# Altium PCB LM-004-A.PcbDoc
Units mil, origin at the board's own origin, x right, y up, seen from the top; angles counter-clockwise.
Board outline 2155.25 x 3754 mil, 4 copper layers (Top Layer, Signal Layer 2, Signal Layer 1, Bottom Layer), stack 30.635 mil thick; 51 components, 69 nets, 287 pads, 42 vias.
Unrouted connection lines stored in the file: 5.
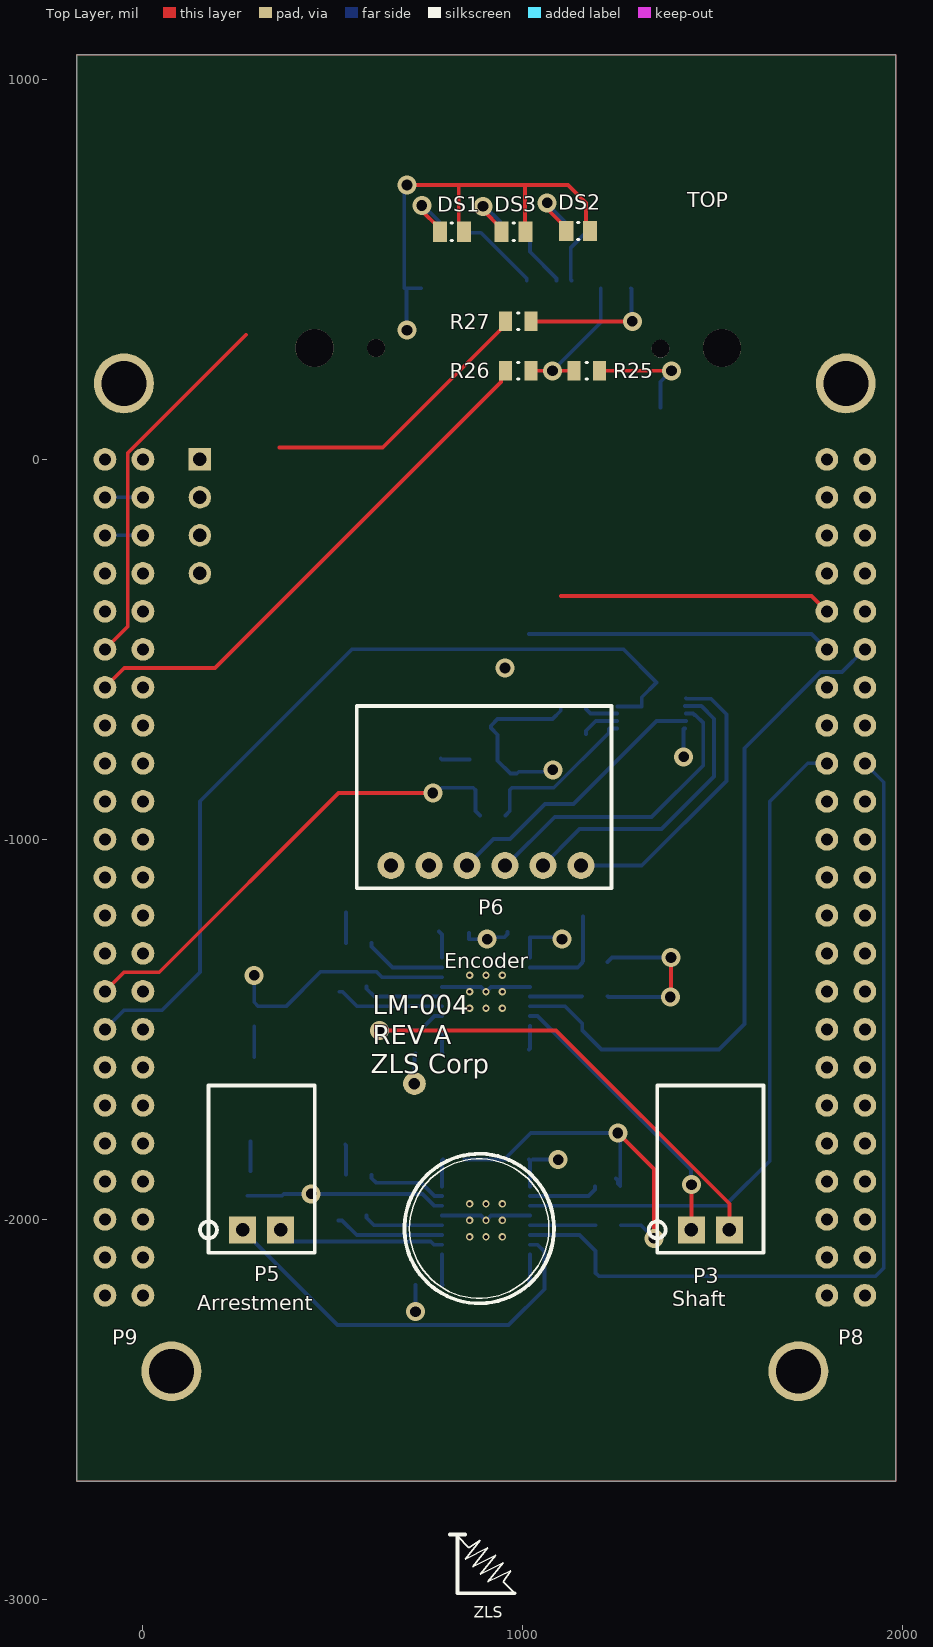
[diagram p0: Top Layer view]
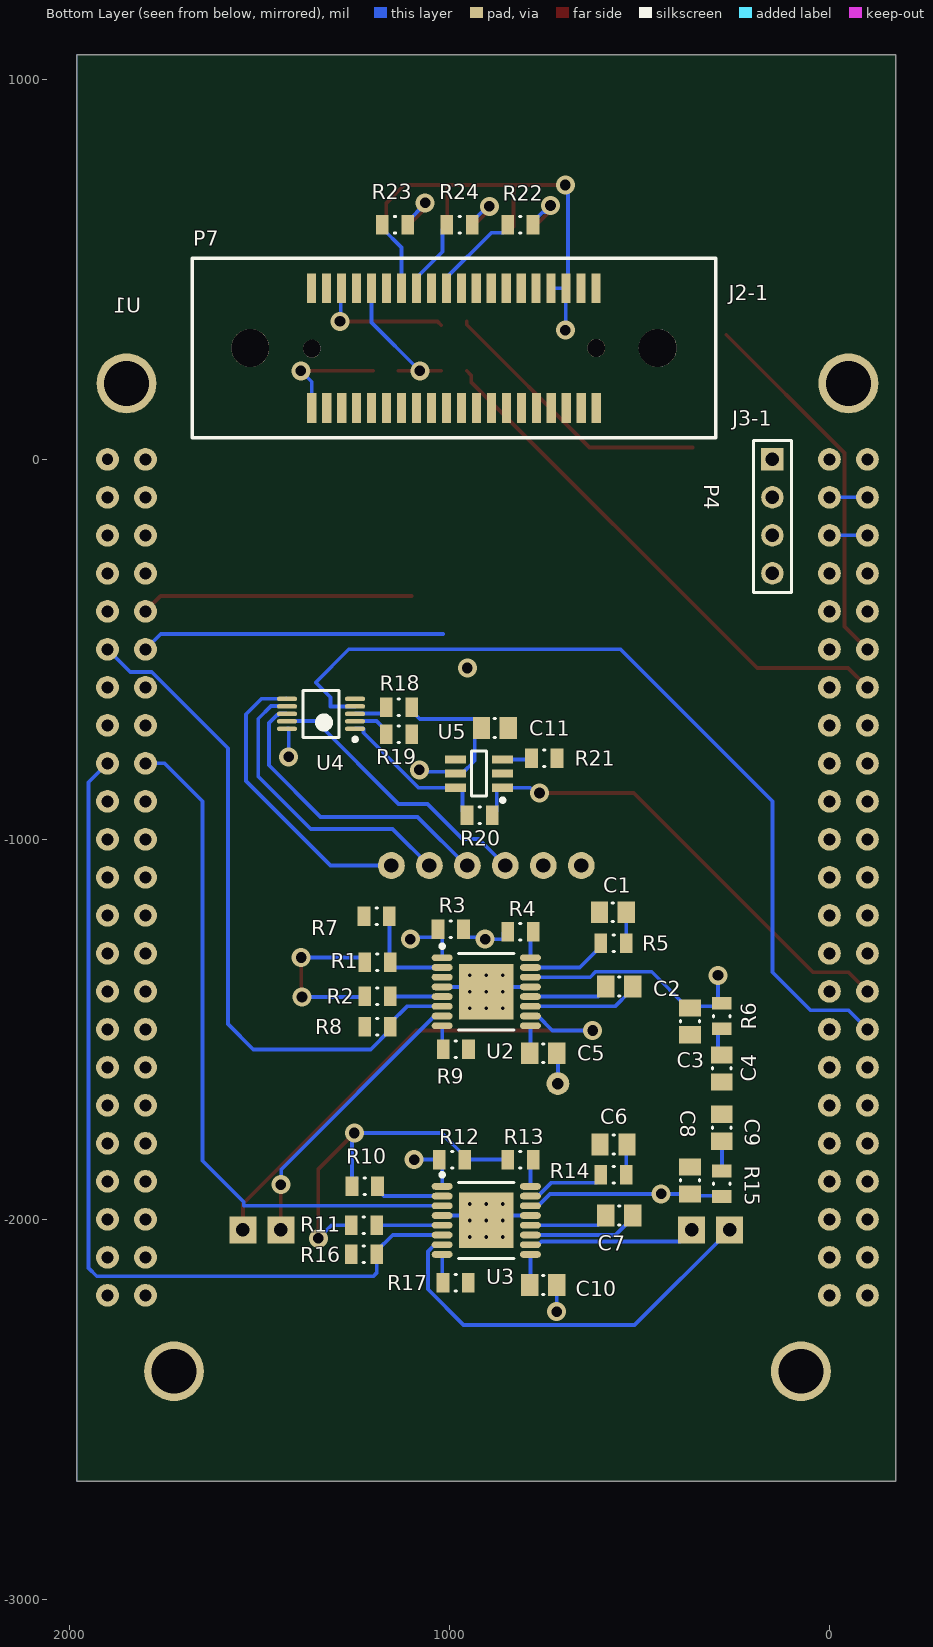
[diagram p1: Bottom Layer view, seen from below]
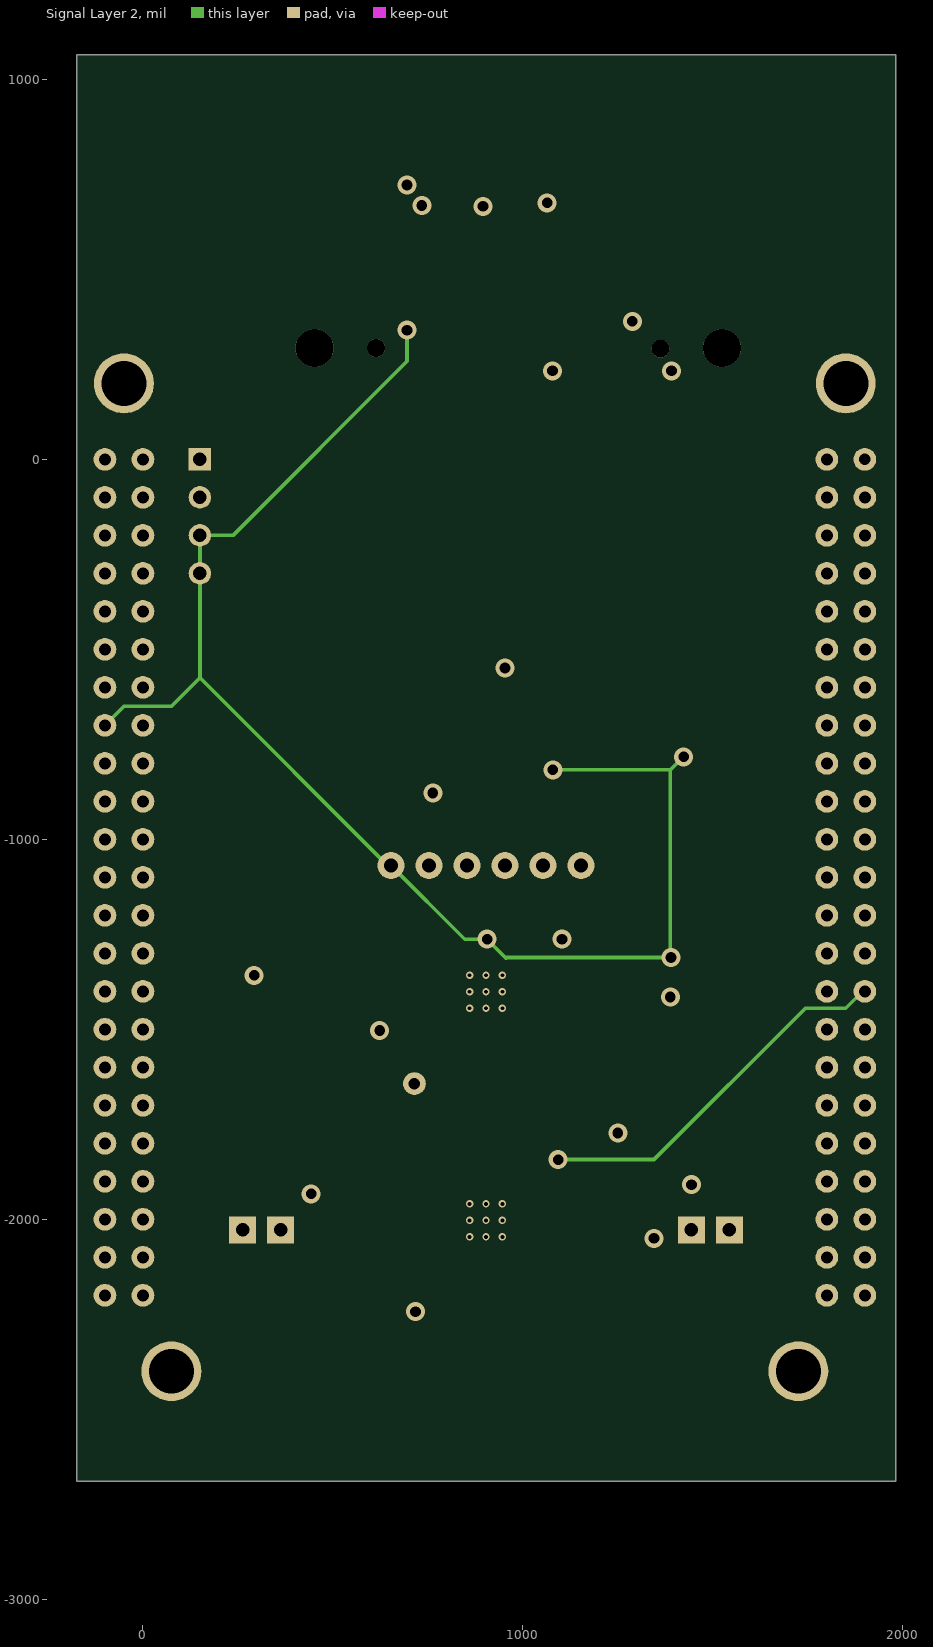
[diagram p2: Signal Layer 2]
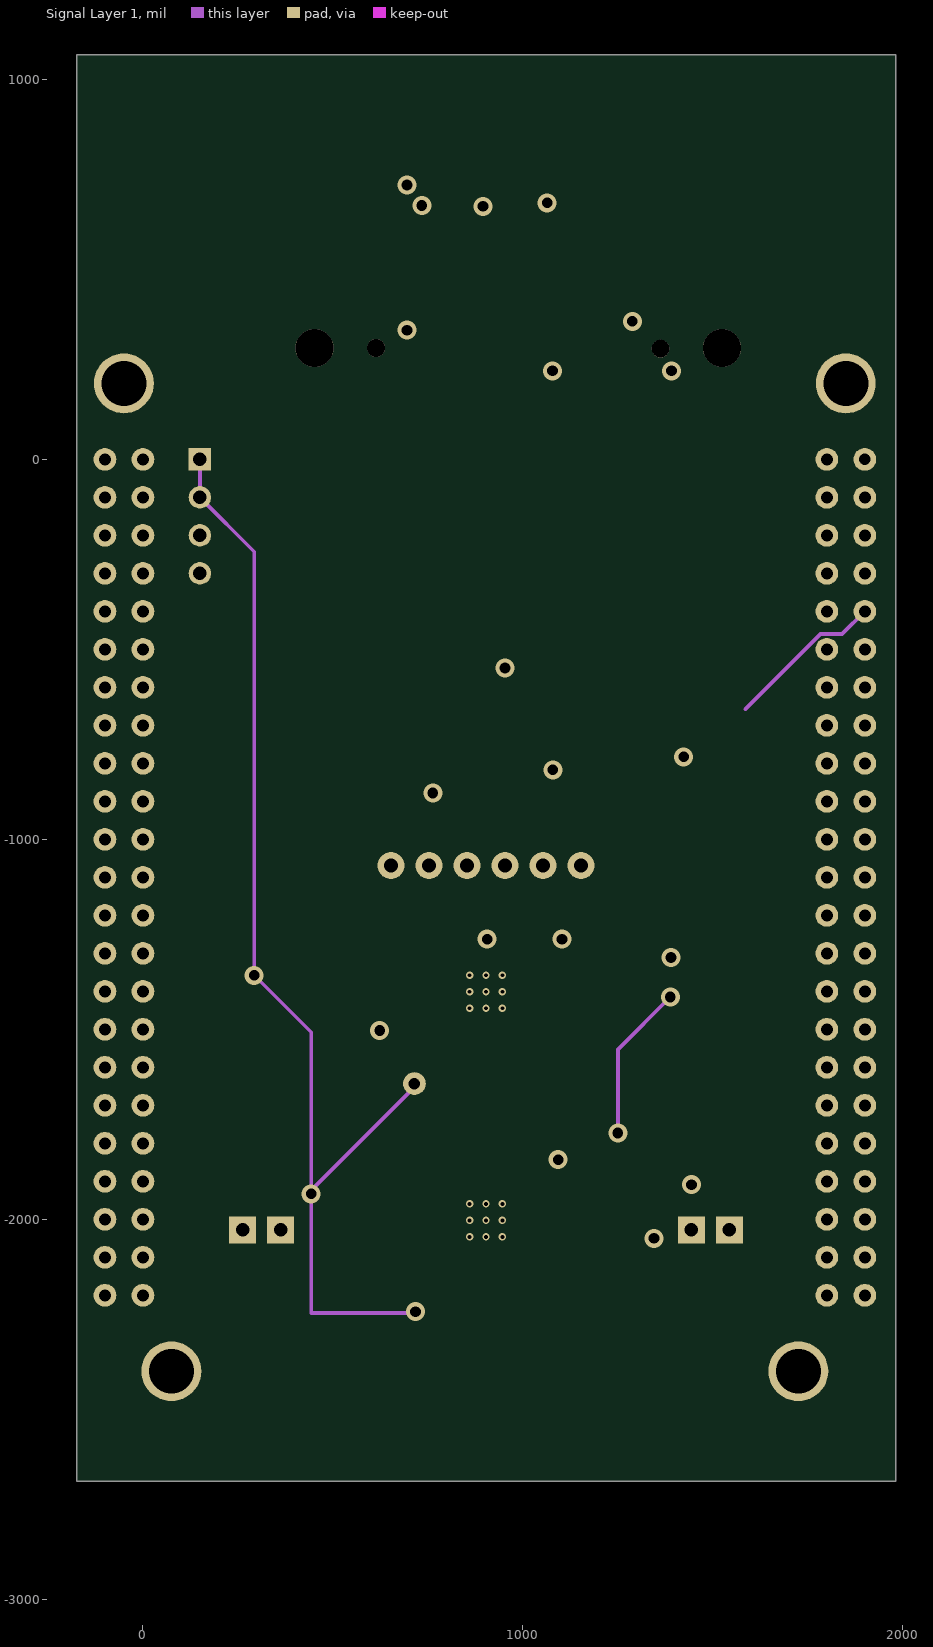
[diagram p3: Signal Layer 1]

## Layer stack, top to bottom
Top Solder: solder mask 0.4, Solder Resist, Dk 3.5
Top Layer: signal copper 1.4
Dielectric 1: core 10, FR-4, Dk 4.2
Signal Layer 2: signal copper 1.4173
Dielectric 4: prepreg 5, Dk 4.2
Signal Layer 1: signal copper 1.4173
Dielectric 3: core 10, Dk 4.2
Bottom Layer: signal copper 1.4
Bottom Solder: solder mask 0.4, Solder Resist, Dk 3.5

## Board outline
-174.24,-2689 1981,-2689 1981,1065 -174.24,1065

## Design rules (kind name [scope] priority, off if disabled: settings)
Clearance [All] p1: gap=5 ignorepadtopadclearanceinfootprint=FALSE
HoleSize [All] p1: absolutevalues=TRUE maxlimit=196.85 minlimit=1 maxpercent=80.000 minpercent=20.000
MinimumSolderMaskSliver [All] p1: minsoldermaskwidth=1.57
PolygonConnect [All] p1: connectstyle=Relief reliefconductorwidth=10 reliefentries=4 polygonreliefangle="90 Angle" airgapwidth=10
RoutingVias [All] p1: holewidth=28 width=50 viastyle="Through Hole" minholewidth=28 minwidth=50 maxholewidth=28 maxwidth=50
SilkToSolderMaskClearance [IsPad] p1: minsilkscreentomaskgap=3.94 clearancetoexposedcopper=TRUE
SolderMaskExpansion [All] p1: expansion=4
Width [All] p1: maxlimit=10 minlimit=10 preferedwidth=10
27 further rules are at their usual default settings.

## Classes and differential pairs
component class Bluetooth: DS1 DS2 DS3 P7 R4 R9 R15 R23 R24 R26
component class BBB_Connections: P2 P3 P4 P5 P6 U1
component class DC-Motor-DRV: C1 C2 C3 C4 C5 C6 C7 C9 C10 C11 R1 R2 R3 R4 R6 R7 R8 R9 R10 R11 R12 R13 R15 R16 R18 R19 R24 R26 U3
component class Encoder: C11 P6 R4 R15 R18 R19 R20 U4

## Components (designator, comment, footprint, x,y, rotation, side; value= is the part's Value field where it differs from the comment)
C1 ".33uF" CAPC0805(2012)145_N 570,-1192 r180 bottom
C2 "0.1uF" CAPC0805(2012)145_N 553,-1387.2 r180 bottom
C3 "0.1uF" CAPC0805(2012)145_N 366.8,-1479 r270 bottom
C4 "4.7uF" CAPC0805(2012)145_N 283,-1603 r270 bottom
C5 "0.1uF" CAPC0805(2012)145_N 753,-1563 r180 bottom
C6 ".33uF" CAPC0805(2012)145_N 568,-1803 r180 bottom
C7 "CAP CER 0.1UF 25V X7R 0805" CAPC0805(2012)145_N 553,-1990.2 r180 bottom
C8 "CAP CER 0.1UF 25V X7R 0805" CAPC0805(2012)145_N 366.8,-1897.76 r90 bottom
C9 "CAP CER 0.1UF 25V X7R 0805" CAPC0805(2012)145_N 283,-1759 r90 bottom
C10 "CAP CER 0.1UF 25V X7R 0805" CAPC0805(2012)145_N 753,-2173 r180 bottom
C11 "CAP CER 0.1UF 25V X7R 0805" CAPC0805(2012)145_N 880.48,-707.01 r180 bottom
DS1 "Lite-On LTST-S220KGKT Green LED, 571 nm 2012 (0805) Side View, Rectangle Lens SMD package" 0805C_L 813.24,598.99 r180 top
DS2 "Lite-On LTST-S220KGKT Green LED, 571 nm 2012 (0805) Side View, Rectangle Lens SMD package" 0805C_L 1145.48,601.23 r180 top
DS3 "Lite-On LTST-S220KGKT Green LED, 571 nm 2012 (0805) Side View, Rectangle Lens SMD package" 0805C_L 975.48,598.99 r180 top
P3 "IPL1-102-01-F-S-RA-K" IPL1-102-01-F-S-RA-K 1493.55,-2027.9 r0 top locked
P4 "SSW-104-01-G-S" HDR1X4 150,0 r270 bottom
P5 "IPL1-102-01-F-S-RA-K" IPL1-102-01-F-S-RA-K 312.45,-2027.9 r0 top locked
P6 "IPL1-106-01-L-S-RA-K" IPL1-106-01-L-S-RA-K 903,-1069 r0 top locked
P7 "FSI-120-03-G-D-E-AB" FSI-120-03-G-D-E-AB 988,293 r180 bottom
R1 "10K" RESC0805(2012)_L 1189.54,-1323 r180 bottom
R2 "10K" RESC0805(2012)_L 1189.54,-1412.8 r180 bottom
R3 "10K" RESC0805(2012)_L 996.65,-1237.01 r0 bottom
R4 "10K" RESC0805(2012)_L 813,-1243 r180 bottom
R5 "10K" RESC0805(2012)_L 568.1,-1273 r0 bottom
R6 "10K" RESC0805(2012)_L 283,-1465.16 r270 bottom
R7 "DNP" RESC0805(2012)_L 1191.54,-1203 r0 bottom
R8 "10K" RESC0805(2012)_L 1189.54,-1493 r0 bottom
R9 "10K" RESC0805(2012)_L 983,-1553 r180 bottom
R10 "10K" RESC0805(2012)_L 1223,-1913 r180 bottom
R11 "10K" RESC0805(2012)_L 1225,-2015.8 r180 bottom
R12 "10K" RESC0805(2012)_L 993,-1843 r0 bottom
R13 "10K" RESC0805(2012)_L 813,-1843 r180 bottom
R14 "10K" RESC0805(2012)_L 568.1,-1883 r0 bottom
R15 "10K" RESC0805(2012)_L 283,-1906.61 r90 bottom
R16 "10K" RESC0805(2012)_L 1225,-2092.57 r0 bottom
R17 "10K" RESC0805(2012)_L 983.69,-2167.01 r180 bottom
R18 "10K" RESC0805(2012)_L 1133,-653 r180 bottom
R19 "10K" RESC0805(2012)_L 1133,-723 r0 bottom
R20 "DNP" RESC0805(2012)_L 920.48,-937.01 r0 bottom
R21 "43.2K" RESC0805(2012)_L 750.48,-787.01 r180 bottom
R22 "3.9k" RESC0805(2012)_L 813.24,617 r180 bottom
R23 "3.9k" RESC0805(2012)_L 1143.24,617 r180 bottom
R24 "3.9k" RESC0805(2012)_L 973.24,617 r180 bottom
R25 "10K" RESC0805(2012)_L 1168,233 r180 top value=3.9k
R26 "100" RESC0805(2012)_L 988,233 r0 top value=3.9k
R27 "100" RESC0805(2012)_L 988,363 r0 top value=3.9k
U1 "BBB" "BEAGLEBONE BLACK MEZANINE" 900,-1100 r180 bottom locked
U2 "DRV8801PWPR" DRV8801PWPR 903,-1401.18 r180 bottom
U3 "DRV8801PWPR" DRV8801PWPR 903,-2003 r180 bottom locked
U4 "MAX1484EUB+" MAX1484EUB+ 1338,-670 r0 bottom
U5 "LTC6994MPS6-2#TRMPBF" LTC6994MPS6-2#TRMPBF 921.98,-827.01 r0 bottom

## Footprints (in the part's own frame and the unit in brackets; to place one, negate y for a bottom-side part, rotate by r counter-clockwise, add the part's x,y. Pads: shape width x height; smd on the part's side, far side on the other; paste and mask are expansions set on the pad)
0805C_L [mm]
  rect 0.95x1.35 smd: 1(-0.8,0) 2(0.8,0)
  silkscreen extent -0.05,-0.58 0.05,0.58, body extent -1.1,-0.72 1.1,0.72, height 0.75
"BEAGLEBONE BLACK MEZANINE" [mil]
  round 60 hole 31.5: 8-1(-900,1100) 8-3(-900,1000) 8-4(-1000,1000) 8-5(-900,900) 8-6(-1000,900) 8-7(-900,800) 8-8(-1000,800) 8-9(-900,700) 8-10(-1000,700) 8-11(-900,600) 8-12(-1000,600) 8-13(-900,500) 8-14(-1000,500) 8-15(-900,400) 8-16(-1000,400) 8-17(-900,300) 8-18(-1000,300) 8-19(-900,200) 8-20(-1000,200) 8-21(-900,100) 8-22(-1000,100) 8-23(-900,0) 8-24(-1000,0) 8-25(-900,-100) 8-26(-1000,-100) 8-27(-900,-200) 8-28(-1000,-200) 8-29(-900,-300) 8-30(-1000,-300) 8-31(-900,-400) 8-32(-1000,-400) 8-33(-900,-500) 8-34(-1000,-500) 8-35(-900,-600) 8-36(-1000,-600) 8-37(-900,-700) 8-38(-1000,-700) 8-39(-900,-800) 8-40(-1000,-800) 8-41(-900,-900) 8-42(-1000,-900) 8-43(-900,-1000) 8-44(-1000,-1000) 8-45(-900,-1100) 8-46(-1000,-1100) 9-1(1000,1100) 9-2(900,1100) 9-3(1000,1000) 9-4(900,1000) 9-5(1000,900) 9-6(900,900) 9-7(1000,800) 9-8(900,800) 9-9(1000,700) 9-10(900,700) 9-11(1000,600) 9-12(900,600) 9-13(1000,500) 9-14(900,500) 9-15(1000,400) 9-16(900,400) 9-17(1000,300) 9-18(900,300) 9-19(1000,200) 9-20(900,200) 9-21(1000,100) 9-22(900,100) 9-23(1000,0) 9-24(900,0) 9-25(1000,-100) 9-26(900,-100) 9-27(1000,-200) 9-28(900,-200) 9-29(1000,-300) 9-30(900,-300) 9-31(1000,-400) 9-32(900,-400) 9-33(1000,-500) 9-34(900,-500) 9-35(1000,-600) 9-36(900,-600) 9-37(1000,-700) 9-38(900,-700) 9-39(1000,-800) 9-40(900,-800) 9-41(1000,-900) 9-42(900,-900) 9-43(1000,-1000) 9-44(900,-1000) 9-45(1000,-1100) 9-46(900,-1100)
  round 60 hole 30 paste+0: 8-2(-1000,1100)
  round 157.48 hole 118.11 paste+0: ""(-950,1300)
  round 157.48 hole 118.11: ""(-825,-1300) ""(825,-1300) ""(950,1300)
  body extent -1047,-1163 1048,1157, height 335
CAPC0805(2012)145_N [mm] "Chip Capacitor, Body 2.0x1.2mm, Height 1.45mm, IPC Medium Density"
  rect 1.15x1.45 smd: 1(-0.9,0) 2(0.9,0)
  silkscreen extent -0.05,-0.62 0.05,0.63, body extent -1.1,-0.72 1.1,0.73, height 1.45
DRV8801PWPR [mm] "IC MOTOR DRIVER PAR 16HTSSOP"
  oval 1.4x0.45 smd: 1(-2.95,2.275) 2(-2.95,1.625) 3(-2.95,0.975) 4(-2.95,0.325) 5(-2.95,-0.325) 6(-2.95,-0.975) 7(-2.95,-1.625) 8(-2.95,-2.275) 9(2.95,-2.275) 10(2.95,-1.625) 11(2.95,-0.975) 12(2.95,-0.325) 13(2.95,0.325) 14(2.95,0.975) 15(2.95,1.625) 16(2.95,2.275)
  rect 3.65x3.7 smd: 17(0,0)
  silkscreen extent -3.08,-2.55 1.85,3.17, body extent -3.2,-2.55 3.2,2.55, height 1.2
FSI-120-03-G-D-E-AB [mil]
  round 100 hole 100: hole(-536.2,0) hole(536.2,0)
  round 47 hole 47: hole(-374.3,-1.6) hole(374.3,0)
  rect 24x78.74 smd: J2-1(373.91,157.36) J2-2(334.51,157.36) J2-3(295.11,157.36) J2-4(255.71,157.36) J2-5(216.31,157.36) J2-6(176.91,157.36) J2-7(137.51,157.36) J2-8(98.11,157.36) J2-9(58.71,157.36) J2-10(19.31,157.36) J2-11(-20.09,157.36) J2-12(-59.49,157.36) J2-13(-98.89,157.36) J2-14(-138.29,157.36) J2-15(-177.69,157.36) J2-16(-217.09,157.36) J2-17(-256.49,157.36) J2-18(-295.89,157.36) J2-19(-335.29,157.36) J2-20(-374.69,157.36) J3-1(374.3,-157.36) J3-2(334.9,-157.36) J3-3(295.5,-157.36) J3-4(256.1,-157.36) J3-5(216.7,-157.36) J3-6(177.3,-157.36) J3-7(137.9,-157.36) J3-8(98.5,-157.36) J3-9(59.1,-157.36) J3-10(19.7,-157.36) J3-11(-19.7,-157.36) J3-12(-59.1,-157.36) J3-13(-98.5,-157.36) J3-14(-137.9,-157.36) J3-15(-177.3,-157.36) J3-16(-216.7,-157.36) J3-17(-256.1,-157.36) J3-18(-295.5,-157.36) J3-19(-334.9,-157.36) J3-20(-374.3,-157.36)
  silkscreen extent -689,-236 689,236, body extent -633,-179 710,188, height 162
HDR1X4 [mm] "Connector; Header; 4 Position"
  rect 1.5x1.5 hole 0.9: 1(0,0)
  round 1.5 hole 0.9: 2(2.54,0) 3(5.08,0) 4(7.62,0)
  silkscreen extent -1.27,-1.27 8.89,1.27
IPL1-102-01-F-S-RA-K [mm] ".100 TERMINAL ASSEMBLY"
  rect 1.8x1.8 hole 0.91: 1(-1.27,0) 2(1.27,0)
  silkscreen extent -4.12,-1.52 3.56,9.65, body extent -3.3,-0.32 3.3,9.4, height 6.56
IPL1-106-01-L-S-RA-K [mm]
  round 1.8 hole 0.95: 1(-6.35,0) 2(-3.81,0) 3(-1.27,0) 4(1.27,0) 5(3.81,0) 6(6.35,0)
  silkscreen extent -8.64,-1.52 8.38,10.67, body extent -8.38,-0.25 8.38,10.41, height 6.56
LTC6994MPS6-2#TRMPBF [mm] "SOT23, 6-Leads, Body 2.90x3.23mm, Pitch 0.95mm, IPC Medium Density"
  rect 1.4x0.55 smd: 1(-1.575,0.95) 2(-1.575,0) 3(-1.575,-0.95) 4(1.575,-0.95) 5(1.575,0) 6(1.575,0.95)
  silkscreen extent -1.7,-1.5 0.5,1.9, body extent -1.93,-1.5 1.92,1.5, height 1
MAX1484EUB+ [mm]
  oval 1.35x0.3 smd: 1(-2.275,1) 2(-2.275,0.5) 3(-2.275,0) 4(-2.275,-0.5) 5(-2.275,-1) 6(2.275,-1) 7(2.275,-0.5) 8(2.275,0) 9(2.275,0.5) 10(2.275,1)
  silkscreen extent -2.4,-1.58 1.2,1.82, body extent -2.45,-1.6 2.45,1.6, height 1.09
RESC0805(2012)_L [mm] "Chip Resistor, Body 2.0x1.3mm, IPC High Density"
  rect 0.85x1.3 smd: 1(-0.85,0) 2(0.85,0)
  silkscreen extent -0.05,-0.55 0.05,0.55, body extent -1.1,-0.67 1.1,0.68, height 0.7

## Part data
C1 C6: library part CMP-1036-04795-1, "CAP CER 0.1UF 25V X7R 0805", Manufacturer="Wurth Electronics Inc.", Manufacturer Part Number=885012207069, Operating Temperature="-55°C ~ 125°C", Package / Case="0805 (2012 Metric)", Ratings=-, Supplier Part Number 1=732-8058-6-ND, Temperature Coefficient=X7R, Tolerance=±10%, Voltage - Rated=25V, Applications="General Purpose", Category=Capacitors, ComponentLink1Description=https://katalog.we-online.de/pbs/datasheet/885012207069.pdf, ComponentLink1URL=https://katalog.we-online.de/pbs/datasheet/885012207069.pdf, Features=-, Height - Seated (Max)=-, Lead Spacing=-, Lead Style=-, Mounting Type="Surface Mount, MLCC", Notification="Current market demand for these product types have resulted in fluctuating and extending lead times. Lead times may differ.", Packaging=Digi-Reel®, Part Status=Active, Pricing 1="1=0.1, 10=0.04, 100=0.0359, 500=0.0318 (USD)", RoHS="RoHS Compliant", Size / Dimension="0.079\" L x 0.049\" W (2.00mm x 1.25mm)", Stock 1=1331, Supplier 1=Digi-Key, Thickness (Max)="0.035\" (0.90mm)"
C2 C3 C5: library part CMP-1036-04795-1, "CAP CER 0.1UF 25V X7R 0805", Capacitance=0.1µF, Manufacturer="Murata Electronics North America", Manufacturer Part Number=GRM21BR71E104KA01L, Operating Temperature="-55°C ~ 125°C", Package / Case="0805 (2012 Metric)", Ratings=-, Supplier Part Number 1=490-1673-6-ND, Temperature Coefficient=X7R, Tolerance=±10%, Voltage - Rated=25V, Applications="General Purpose", Category=Capacitors, ComponentLink1Description=http://www.murata.com/~/media/webrenewal/support/library/catalog/products/capacitor/mlcc/c02e.ashx, ComponentLink1URL=http://www.murata.com/~/media/webrenewal/support/library/catalog/products/capacitor/mlcc/c02e.ashx, Features=-, Height - Seated (Max)=-, Lead Spacing=-, Lead Style=-, Mounting Type="Surface Mount, MLCC", Packaging=Digi-Reel®, Part Status=Active, Pricing 1="1=0.2, 10=0.145, 100=0.0683, 500=0.04788, 1000=0.03964 (USD)", RoHS="RoHS Compliant", Size / Dimension="0.079\" L x 0.049\" W (2.00mm x 1.25mm)", Stock 1=891652, Supplier 1=Digi-Key, Thickness (Max)="0.053\" (1.35mm)"
C4: library part CMP-1036-04795-1, "CAP CER 4.7UF 25V 10% X7R 0805", Capacitance=4.7µF, Manufacturer="Murata Electronics North America", Manufacturer Part Number=GRM21BR71E104KA01L, Operating Temperature="-55°C ~ 125°C", Package / Case="0805 (2012 Metric)", Ratings=-, Supplier Part Number 1=490-1673-6-ND, Temperature Coefficient=X7R, Tolerance=±10%, Voltage - Rated=25V, Applications="General Purpose", Category=Capacitors, ComponentLink1Description=http://www.murata.com/~/media/webrenewal/support/library/catalog/products/capacitor/mlcc/c02e.ashx, ComponentLink1URL=http://www.murata.com/~/media/webrenewal/support/library/catalog/products/capacitor/mlcc/c02e.ashx, Features=-, Height - Seated (Max)=-, Lead Spacing=-, Lead Style=-, Mounting Type="Surface Mount, MLCC", Packaging=Digi-Reel®, Part Status=Active, Pricing 1="1=0.2, 10=0.145, 100=0.0683, 500=0.04788, 1000=0.03964 (USD)", RoHS="RoHS Compliant", Size / Dimension="0.079\" L x 0.049\" W (2.00mm x 1.25mm)", Stock 1=891652, Supplier 1=Digi-Key, Thickness (Max)="0.053\" (1.35mm)"
C7 C8 C10 C11: library part CMP-1036-04795-1, Capacitance=0.1µF, Manufacturer="Murata Electronics North America", Manufacturer Part Number=GRM21BR71E104KA01L, Operating Temperature="-55°C ~ 125°C", Package / Case="0805 (2012 Metric)", Ratings=-, Supplier Part Number 1=490-1673-6-ND, Temperature Coefficient=X7R, Tolerance=±10%, Voltage - Rated=25V, Applications="General Purpose", Category=Capacitors, ComponentLink1Description=http://www.murata.com/~/media/webrenewal/support/library/catalog/products/capacitor/mlcc/c02e.ashx, ComponentLink1URL=http://www.murata.com/~/media/webrenewal/support/library/catalog/products/capacitor/mlcc/c02e.ashx, Features=-, Height - Seated (Max)=-, Lead Spacing=-, Lead Style=-, Mounting Type="Surface Mount, MLCC", Packaging=Digi-Reel®, Part Status=Active, Pricing 1="1=0.2, 10=0.145, 100=0.0683, 500=0.04788, 1000=0.03964 (USD)", RoHS="RoHS Compliant", Size / Dimension="0.079\" L x 0.049\" W (2.00mm x 1.25mm)", Stock 1=891652, Supplier 1=Digi-Key, Thickness (Max)="0.053\" (1.35mm)"
C9: library part CMP-1036-04795-1, "CAP CER 0.47UF 25V X7R 0805", Capacitance=4.7µF, Manufacturer="Murata Electronics North America", Manufacturer Part Number=GRM21BR71E104KA01L, Operating Temperature="-55°C ~ 125°C", Package / Case="0805 (2012 Metric)", Ratings=-, Supplier Part Number 1=490-1673-6-ND, Temperature Coefficient=X7R, Tolerance=±10%, Voltage - Rated=25V, Applications="General Purpose", Category=Capacitors, ComponentLink1Description=http://www.murata.com/~/media/webrenewal/support/library/catalog/products/capacitor/mlcc/c02e.ashx, ComponentLink1URL=http://www.murata.com/~/media/webrenewal/support/library/catalog/products/capacitor/mlcc/c02e.ashx, Features=-, Height - Seated (Max)=-, Lead Spacing=-, Lead Style=-, Mounting Type="Surface Mount, MLCC", Packaging=Digi-Reel®, Part Status=Active, Pricing 1="1=0.2, 10=0.145, 100=0.0683, 500=0.04788, 1000=0.03964 (USD)", RoHS="RoHS Compliant", Size / Dimension="0.079\" L x 0.049\" W (2.00mm x 1.25mm)", Stock 1=891652, Supplier 1=Digi-Key, Thickness (Max)="0.053\" (1.35mm)"
DS1 DS2 DS3: library part "LED A/K", Case/Package=0805, Case Code (Metric)=2012, Colour=Green, Forward Current=20mA, Forward Voltage=2V, Lens Colour=Colorless, Manufacturer="Vishay / Lite-On", Manufacturer Part Number=LTST-S220KGKT, Max Operating Temperature=85°C, Min Operating Temperature=-55°C, Package Quantity=4000, Power Dissipation=75W, Power Rating=75mW, Supplier Part Number 1=160-1468-1-ND, Case Code (Imperial)=0805, ComponentLink1Description=https://datasheet.ciiva.com/11775/0900766b80dc0b70-11775441.pdf, ComponentLink1URL=https://datasheet.ciiva.com/11775/0900766b80dc0b70-11775441.pdf, ComponentLink2Description=https://datasheet.ciiva.com/2110/s-110-ltst-s220kgkt-2110069.pdf, ComponentLink2URL=https://datasheet.ciiva.com/2110/s-110-ltst-s220kgkt-2110069.pdf, ComponentLink3Description=https://datasheet.ciiva.com/2110/s-110-ltst-s220kgkt-2110070.pdf, ComponentLink3URL=https://datasheet.ciiva.com/2110/s-110-ltst-s220kgkt-2110070.pdf, ComponentLink4Description=https://datasheet.ciiva.com/12400/100-ltst-s220kgkt-59602-12400886.pdf, ComponentLink4URL=https://datasheet.ciiva.com/12400/100-ltst-s220kgkt-59602-12400886.pdf, ComponentLink5Description=https://datasheet.ciiva.com/2110/s-110-ltst-s220kgkt-2110071.pdf, ComponentLink5URL=https://datasheet.ciiva.com/2110/s-110-ltst-s220kgkt-2110071.pdf, ComponentLink6Description=https://datasheet.ciiva.com/16379/ltst-s220kgkt-16379082.pdf, ComponentLink6URL=https://datasheet.ciiva.com/16379/ltst-s220kgkt-16379082.pdf, ComponentLink7Description=http://www.farnell.com/cad/2124774.pdf, ComponentLink7URL=http://www.farnell.com/cad/2124774.pdf, ComponentLink8Description=http://www.farnell.com/datasheets/693084.pdf, ComponentLink8URL=http://www.farnell.com/datasheets/693084.pdf, Depth=0.6mm, Dominant Wavelength=568nm, Height=0.6mm, Illumination Colour=Green, Lead Free="Lead Free", Length=2.1mm, Lens Style=Diffused,Colorless, Lens Transparency=Clear, Luminous Intensity=35mcd, Mount="Surface Mount", Number of Elements=1, Number of LEDs=1, Number of Pins=2, Packaging="Tape and Reel", Pricing 1="1=0.29, 10=0.212, 25=0.1564, 100=0.1117, 250=0.0759, 500=0.067, 1000=0.0525 (USD)", Pricing 2="1=0.325, 10=0.317, 100=0.23, 200=0.228, 400=0.182, 900=0.147, 3000=0.114, 9000=0.107 (GBP)", Radiation Hardening=No, RoHS=YES, Stock 1=74800, Stock 2=2271, Supplier 1=Digi-Key, Supplier 2=Farnell, Supplier Part Number 2=2062310, Test Current=20mA, Viewing Angle=130°, Wavelength=574nm, Width=1mm
P3 P5: Current Rating=-, Insulation Color=Natural, Manufacturer="Samtec Inc.", Material Flammability Rating="UL94 V-0", Operating Temperature="-55°C ~ 125°C", Supplier Part Number 1=IPL1-102-01-F-S-RA-K-ND, Voltage Rating="675VAC, 954VDC", Applications=-, Category="Connectors, Interconnects", ComponentLink1Description=http://suddendocs.samtec.com/prints/ipl1-1xx-xx-xxx-s-xx-x-xx-mkt.pdf, ComponentLink1URL=http://suddendocs.samtec.com/prints/ipl1-1xx-xx-xxx-s-xx-x-xx-mkt.pdf, Connector Type=Header, Contact Finish - Mating=Gold, Contact Finish - Post=Tin, Contact Finish Thickness - Mating="3.00µin (0.076µm)", Contact Finish Thickness - Post=-, Contact Length - Mating="0.215\" (5.46mm)", Contact Length - Post="0.085\" (2.16mm)", Contact Material="Phosphor Bronze", Contact Shape=Square, Contact Type="Male Pin", Fastening Type="Locking Ramp", Features=-, Ingress Protection=-, Insulation Height="0.240\" (6.10mm)", Insulation Material="Liquid Crystal Polymer (LCP)", Manufacturer Part Number=IPL1-102-01-F-S-RA-K, Mated Stacking Heights=-, Mounting Type="Through Hole, Right Angle", Number of Positions=2, Number of Positions Loaded=All, Number of Rows=1, Overall Contact Length=-, Packaging=Tube, Part Status=Active, Pitch - Mating="0.100\" (2.54mm)", Pricing 1="1=2.09 (USD)", RoHS="RoHS Compliant", Row Spacing - Mating=-, Shrouding="Shrouded - 4 Wall", Stock 1=0, Style="Board to Cable/Wire", Supplier 1=Digi-Key, Termination=Solder
P4: library part "Header 4", "Header, 4-Pin", Current Rating="5.7A per Contact", Insulation Color=Black, Manufacturer="Samtec Inc.", Material Flammability Rating="UL94 V-0", Operating Temperature="-55°C ~ 125°C", Supplier Part Number 1=SAM1209-04-ND, Voltage Rating=-, Applications=-, Category="Connectors, Interconnects", ComponentLink1Description=http://suddendocs.samtec.com/prints/ssw-1xx-xx-xxx-x-xx-xxx-xx-mkt.pdf, ComponentLink1URL=http://suddendocs.samtec.com/prints/ssw-1xx-xx-xxx-x-xx-xxx-xx-mkt.pdf, Connector Type=Receptacle, Contact Finish - Mating=Gold, Contact Finish - Post=Gold, Contact Finish Thickness - Mating="20.0µin (0.51µm)", Contact Finish Thickness - Post="3.00µin (0.076µm)", Contact Length - Post="0.104\" (2.64mm)", Contact Material="Phosphor Bronze", Contact Shape=Square, Contact Type=Forked, Fastening Type=Push-Pull, Features=-, Ingress Protection=-, Insulation Height="0.335\" (8.51mm)", Insulation Material="Liquid Crystal Polymer (LCP)", Manufacturer Part Number=SSW-104-01-G-S, Mated Stacking Heights=-, Mounting Type="Through Hole", Number of Positions=4, Number of Positions Loaded=All, Packaging=Bulk, Part Status=Active, Pitch - Mating="0.100\" (2.54mm)", Pricing 1="1=1.85, 10=1.654, 100=1.3623, 500=1.07684, 1000=0.9244, 5000=0.84331, 10000=0.81088 (USD)", RoHS="RoHS Compliant", Row Spacing - Mating=-, Stock 1=360, Style="Board to Board or Cable", Supplier 1=Digi-Key, Termination=Solder
P6: library part "Header 6", "Header, 6-Pin", Current Rating=-, Insulation Color=Natural, Manufacturer="Samtec Inc.", Material Flammability Rating="UL94 V-0", Operating Temperature="-55°C ~ 125°C", Supplier Part Number 1=SAM9602-ND, Voltage Rating="675VAC, 954VDC", Applications=-, Category="Connectors, Interconnects", ComponentLink1Description=http://suddendocs.samtec.com/prints/ipl1-1xx-xx-xxx-s-xx-x-xx-mkt.pdf, ComponentLink1URL=http://suddendocs.samtec.com/prints/ipl1-1xx-xx-xxx-s-xx-x-xx-mkt.pdf, Connector Type=Header, Contact Finish - Mating=Gold, Contact Finish - Post=Tin, Contact Finish Thickness - Mating="10.0µin (0.25µm)", Contact Finish Thickness - Post=-, Contact Length - Mating="0.215\" (5.46mm)", Contact Length - Post="0.085\" (2.16mm)", Contact Material="Phosphor Bronze", Contact Shape=Square, Contact Type="Male Pin", Fastening Type="Locking Ramp", Features=-, Ingress Protection=-, Insulation Height="0.240\" (6.10mm)", Insulation Material="Liquid Crystal Polymer (LCP)", Manufacturer Part Number=IPL1-106-01-L-S-RA-K, Mated Stacking Heights=-, Mounting Type="Through Hole, Right Angle", Number of Positions=6, Number of Positions Loaded=All, Number of Rows=1, Overall Contact Length=-, Packaging=Tube, Part Status=Active, Pitch - Mating="0.100\" (2.54mm)", Pricing 1="1=2.73, 34=2.39794, 102=2.18, 510=1.853, 1020=1.5805, 5032=1.417 (USD)", RoHS="RoHS Compliant", Row Spacing - Mating=-, Shrouding="Shrouded - 4 Wall", Stock 1=6, Style="Board to Cable/Wire", Supplier 1=Digi-Key, Termination=Solder
R1 R2 R3 R4 R5 R7 R8 R9 R10 R11 R12 R13 R14 R16 R17 R18 R19: library part CMP-1013-00215-1, "RES SMD 10K OHM 1% 1/8W 0805", Manufacturer="Vishay Dale", Manufacturer Part Number=CRCW080510K0FKEA, Operating Temperature="-55°C ~ 155°C", Package / Case="0805 (2012 Metric)", Power (Watts)="0.125W, 1/8W", Supplier Device Package=0805, Supplier Part Number 1=541-10.0KCCT-ND, Temperature Coefficient=±100ppm/°C, Tolerance=±1%, Category=Resistors, ComponentLink1Description=http://www.vishay.com/docs/20035/dcrcwe3.pdf, ComponentLink1URL=http://www.vishay.com/docs/20035/dcrcwe3.pdf, Composition="Thick Film", Failure Rate=-, Features="Automotive AEC-Q200", Height - Seated (Max)="0.020\" (0.50mm)", Packaging="Cut Tape (CT)", Part Status=Active, Pricing 1="1=0.1, 10=0.055, 100=0.0223, 1000=0.01003, 2500=0.0087 (USD)", RoHS="RoHS Compliant", Size / Dimension="0.079\" L x 0.049\" W (2.00mm x 1.25mm)", Stock 1=1104982, Supplier 1=Digi-Key
R6 R15: library part CMP-1013-00215-1, "RES SMD 1R OHM 1% 1/8W 0805", Manufacturer="Vishay Dale", Manufacturer Part Number=CRCW080510K0FKEA, Operating Temperature="-55°C ~ 155°C", Package / Case="0805 (2012 Metric)", Power (Watts)="0.125W, 1/8W", Supplier Device Package=0805, Supplier Part Number 1=541-10.0KCCT-ND, Temperature Coefficient=±100ppm/°C, Tolerance=±1%, Category=Resistors, ComponentLink1Description=http://www.vishay.com/docs/20035/dcrcwe3.pdf, ComponentLink1URL=http://www.vishay.com/docs/20035/dcrcwe3.pdf, Composition="Thick Film", Failure Rate=-, Features="Automotive AEC-Q200", Height - Seated (Max)="0.020\" (0.50mm)", Packaging="Cut Tape (CT)", Part Status=Active, Pricing 1="1=0.1, 10=0.055, 100=0.0223, 1000=0.01003, 2500=0.0087 (USD)", RoHS="RoHS Compliant", Size / Dimension="0.079\" L x 0.049\" W (2.00mm x 1.25mm)", Stock 1=1104982, Supplier 1=Digi-Key
R20: library part CMP-1013-00215-1, "RES SMD 0 OHM 5% 1/8W 0805"
R21: library part CMP-1013-00215-1, "RES SMD 43.2K OHM 1% 1/8W 0805", Manufacturer="Vishay Dale", Manufacturer Part Number=CRCW080543K2FKEA, Operating Temperature="-55°C ~ 155°C", Package / Case="0805 (2012 Metric)", Power (Watts)="0.125W, 1/8W", Supplier Device Package=0805, Supplier Part Number 1=541-43.2KCCT-ND, Temperature Coefficient=±100ppm/°C, Tolerance=±1%, Category=Resistors, ComponentLink1Description=http://www.vishay.com/docs/20035/dcrcwe3.pdf, ComponentLink1URL=http://www.vishay.com/docs/20035/dcrcwe3.pdf, Composition="Thick Film", Failure Rate=-, Features="Automotive AEC-Q200", Height - Seated (Max)="0.020\" (0.50mm)", Packaging="Cut Tape (CT)", Part Status=Active, Pricing 1="1=0.1, 10=0.055, 100=0.0223, 1000=0.01003, 2500=0.0087 (USD)", RoHS="RoHS Compliant", Size / Dimension="0.079\" L x 0.049\" W (2.00mm x 1.25mm)", Stock 1=68577, Supplier 1=Digi-Key
R22 R23 R24 R25 R26 R27: library part CMP-1013-00215-1, "2R55 0.125W 1% 0805 (2012 Metric)  SMD", Case-EIA=0805, Case-Metric=2012, Power="0.125 W", Tolerance="1 %", Technology=SMT
U1: library part Beaglebone_Black_Mezanine, "Beaglebone Black", Current Rating="5.7A per Contact", Insulation Color=Black, Manufacturer="Samtec Inc.", Manufacturer Part Number=SSW-123-01-G-D-LL, Material Flammability Rating="UL94 V-0", Operating Temperature="-55°C ~ 125°C", Supplier Part Number 1=SSW-123-01-G-D-LL-ND, Voltage Rating=-, Applications=-, Category="Connectors, Interconnects", Connector Type=Receptacle, Contact Finish - Mating=Gold, Contact Finish - Post=Gold, Contact Finish Thickness - Mating="20.0µin (0.51µm)", Contact Finish Thickness - Post="3.00µin (0.076µm)", Contact Length - Post="0.104\" (2.64mm)", Contact Material="Phosphor Bronze", Contact Shape=Square, Contact Type=Forked, Fastening Type=Push-Pull, Features=-, Ingress Protection=-, Insulation Height="0.335\" (8.51mm)", Insulation Material="Liquid Crystal Polymer (LCP)", Mated Stacking Heights=-, Mounting Type="Through Hole", Number of Positions=46, Number of Positions Loaded=All, Packaging=Bulk, Part Status=Active, Pitch - Mating="0.100\" (2.54mm)", Pricing 1="1=6.07 (USD)", RoHS="RoHS Compliant", Row Spacing - Mating="0.100\" (2.54mm)", Stock 1=0, Style="Board to Board or Cable", Supplier 1=Digi-Key, Termination="Kinked Pin, Solder"
U2 U3: "IC MOTOR DRIVER PAR 16HTSSOP", Base Part Number=DRV8801, Current - Output=2.8A, Manufacturer="Texas Instruments", Operating Temperature="-40°C ~ 150°C (TJ)", Package / Case="16-TSSOP (0.173\", 4.40mm Width) Exposed Pad", Supplier Device Package=16-HTSSOP, Supplier Part Number 1=296-25378-1-ND, Voltage - Load="8 V ~ 38 V", Applications="General Purpose", Category="Integrated Circuits (ICs)", ComponentLink1Description=http://www.ti.com/lit/ds/symlink/drv8801.pdf, ComponentLink1URL=http://www.ti.com/lit/ds/symlink/drv8801.pdf, Function="Driver - Fully Integrated, Control and Power Stage", Interface=Parallel, Manufacturer Part Number=DRV8801PWPR, Motor Type - AC, DC="Brushed DC", Motor Type - Stepper=Bipolar, Mounting Type="Surface Mount", Output Configuration="Half Bridge (2)", Packaging="Cut Tape (CT)", Part Status=Active, Pricing 1="1=2.11, 10=1.892, 100=1.5204, 500=1.24914, 1000=1.035 (USD)", RoHS="RoHS Compliant", Step Resolution=-, Stock 1=44037, Supplier 1=Digi-Key, Technology=DMOS, Voltage - Supply="8 V ~ 38 V"
U4: "IC TXRX RS485/RS422 10-UMAX", Base Part Number=MAX1484, Manufacturer="Maxim Integrated", Operating Temperature="-40°C ~ 85°C", Package / Case="10-TFSOP, 10-MSOP (0.118\", 3.00mm Width)", Supplier Device Package=10-uMAX, Supplier Part Number 1=MAX1484EUB+-ND, Voltage - Supply="4.75 V ~ 5.25 V", Category="Integrated Circuits (ICs)", ComponentLink1Description=https://datasheets.maximintegrated.com/en/ds/MAX1481-MAX1486.pdf, ComponentLink1URL=https://datasheets.maximintegrated.com/en/ds/MAX1481-MAX1486.pdf, Data Rate=12Mbps, Duplex=Full, Manufacturer Part Number=MAX1484EUB+, Mounting Type="Surface Mount", Number of Drivers/Receivers=1/1, Packaging=Tube, Part Status=Active, Pricing 1="1=2.57, 10=2.442, 25=2.28, 50=2.28 (USD)", Protocol="RS422, RS485", RoHS="RoHS Compliant", Stock 1=1906, Supplier 1=Digi-Key, Type=Transceiver
U5: Base Part Number=LTC6994, Manufacturer="Linear Technology/Analog Devices", Manufacturer Part Number=LTC6994CS6-2#TRMPBF, Operating Temperature="0°C ~ 70°C", Package / Case="SOT-23-6 Thin, TSOT-23-6", Supplier Device Package=TSOT-23-6, Supplier Part Number 1=LTC6994CS6-2#TRMPBFCT-ND, Voltage - Supply="2.25 V ~ 5.5 V", Available Total Delays="1µs ~ 33.6s", Category="Integrated Circuits (ICs)", ComponentLink1Description=http://www.linear.com/docs/29725, ComponentLink1URL=http://www.linear.com/docs/29725, Delay to 1st Tap=-, Function=Programmable, Mounting Type="Surface Mount", Packaging="Cut Tape (CT)", Part Status=Active, Pricing 1="1=3.42, 25=3.0496, 100=1.9217, 250=1.76156 (USD)", RoHS="RoHS Compliant", Stock 1=1401, Supplier 1=Digi-Key
P7: Supplier 1=Avnet, Supplier Part Number 1=FSI-120-03-G-D-E-AB

## Free pads (board coordinates)
  round 60 hole 30: 2(714.61,-1643)

## Via types
v1: diameter 50, hole 28, Top Layer to Bottom Layer, 24 vias
v2: diameter 19.68, hole 10, Top Layer to Bottom Layer, 18 vias

## Nets (pads, with @x,y where several pads share a name; then routed paths per layer and width w, separated by ;. In a path a pad name is that pad's centre, name@x,y a point inside that pad or via, vN(x,y) a via of type N, cw(c..) or ccw(c..) an arc to the next point about the centre after c; other vN are vias at no path point)
+3.3: C11.1 DS1.1 DS2.1 DS3.1 P4.3 P4.4 P6.1 P7.J2-3 P7.J2-4 R1.1 R2.1 R3.1 R4.1 R10.1 R11.1 R12.1 R13.1 R18.2 U1.9-15 U4.10 U5.5 | length 7754.9
  Top Layer w10: v1(695,722) 1005.48,722 ; 831.04,722 831.04,612.69 DS1.1 ; DS3.1 1005.48,600.49 1005.48,722 ; DS2.1@1166.03,598.99 1166.03,674.97 1119,722 1005.48,722 ; v1(1250.08,-1773) 1345,-1867.92 v1(1345,-2050) ; v1(1388,-1415) 1390,-1413 v1(1390,-1311)
  Signal Layer 1 w10: v1@1254.39,-1777.31 v1(1250.08,-1773) 1250.08,-1552.92 v1(1388,-1415)
  Signal Layer 2 w10: U1.9-15 -50,-650 75,-650 150,-575 ; P6.1@636.72,-1069 P6.1@641.93,-1074.21 ; v1(695,340) 695,257.99 237.01,-200 P4.3 P4.4 150,-575 ; v1(1079,-817.01) 1388.99,-817.01 v1(1423,-783) 1388,-818 1388,-1309 v1(1390,-1311) 958,-1311 956,-1313 v1(906,-1263) 847,-1263 P6.1 644,-1069 150,-575
  Bottom Layer w10: P7.J2-3@693.94,444 693.94,341.06 v1(695,340) ; v1(695,722) 688,701.74 688,450.36 P7.J2-4 ; R13.1 R12.1 959.54,-1834.14 1020.68,-1773 v1(1250.08,-1773) 1256.46,-1779.39 R10.1 1250.08,-1906.61 1250.08,-1897.76 R10.1@1244.73,-1892.41 ; R4.1@858.2,-1245.87 858.2,-1263 v1(906,-1263) 911.4,-1257.6 951.45,-1257.6 959.54,-1249.51 R3.1@959.54,-1244.14 ; v1(1079,-817.01) 1074,-822.01 988.98,-822.01 U5.5 967.25,-827.01 933.55,-793.31 933.55,-724.65 C11.1 915.91,-701.1 933.55,-683.46 1077.93,-683.46 1099.53,-661.86 R18.2 ; R2.1 1225.2,-1415 v1(1388,-1415) ; R1.1 1235,-1311 v1(1390,-1311) ; R11.1 1310.8,-2015.8 v1(1345,-2050) ; v1(1423,-783) 1423,-709.21 1423.84,-708.37 U4.10@1426.57,-708.37
"+3.3 BBB": U1.9-3 U1.9-4 | length 100
  Bottom Layer w10: U1.9-3 U1.9-4
"+5 BBB": U1.9-5 U1.9-6 | length 100
  Bottom Layer w10: U1.9-5 U1.9-6
+12: C3.1 C5.2 C8.1 C10.2 P4.1 P4.2 pad.2 R6.1 R15.1 U2.14 U3.14 | length 4326
  Signal Layer 1 w10: P4.1 P4.2 293,-243 v1(293,-1357.87) 443,-1507.87 v1@443,-1914.61 ; pad.2 714.61,-1652.22 451.45,-1915.39 443.77,-1915.39 v1@443,-1914.61 ; v1(717.57,-2243) 713.56,-2247.01 443,-2247.01 v1@443,-1914.61
  Bottom Layer w10: R15.1@274.73,-1937.8 366.8,-1937.8 371.54,-1933.06 735.53,-1933.06 767.08,-1964.61 U3.14 ; v1(293,-1357.87) 293,-1428.98 303.59,-1439.57 376.71,-1439.57 467.61,-1348.66 615.21,-1348.66 629.35,-1362.8 U2.14 ; pad.2 714.61,-1565.95 C5.2 ; v1(717.57,-2243) C10.2
  other v1: 443,-1933.06
"Blue LED": P7.J2-14 R23.1 | length 167.7
  Bottom Layer w10: P7.J2-14@1128.23,470.96 1126.29,472.9 1126.29,557.72 1176.71,608.14 R23.1
CLK+: P6.4 U4.8 | length 797.6
  Bottom Layer w10: P6.4@954.57,-1070.57 1084.15,-941 1338.93,-941 1475,-804.93 1475,-693.96 1453.82,-672.78 1451.51,-672.78 1447.73,-669 U4.8@1429.21,-669
CLK-: P6.5 U4.7 | length 801.3
  Bottom Layer w10: P6.5@1046.05,-1078.17 1046.05,-1075.95 1149.4,-972.6 1364.81,-972.6 1503,-834.41 1503,-682.58 1469.73,-649.31 U4.7@1426.57,-649.31
DTA+: P6.3 U4.9 | length 733.7
  Bottom Layer w10: P6.3 923,-999 966,-999 1058,-907 1133.69,-907 1352,-688.69 1426.57,-688.69 U4.9@1429.21,-688.69
DTA-: P6.6 U4.6 | length 779
  Bottom Layer w10: P6.6@1153.75,-1082 1166.75,-1069 1313,-1069 1535.67,-846.33 1535.67,-670.67 1494.98,-629.98 1430.4,-629.98 U4.6@1429.21,-628.79
GND: C1.1 C3.2 C4.2 C6.1 C8.2 C9.2 C11.2 P6.2 P7.J2-1 P7.J2-2 R7.2 R8.2 R9.2 R16.2 R17.2 R19.1 R21.2 U1.8-1 U1.8-2 U1.9-1 U1.9-2 U1.9-43 U1.9-44 U1.9-45 U1.9-46 U2.4 U2.13 U2.17 U3.4 U3.13 U3.17 U4.5 U5.2 U5.4 | length 485.8
  Bottom Layer w10: U3.13 890.2,-1990.2 v2(903,-2003) 915.8,-1990.2 U3.4 ; U2.13 890.2,-1388.39 v2(903,-1401.18) 915.8,-1388.39 U2.4
  other v2: 859.69,-2046.31 903,-2046.31 946.31,-2046.31 859.69,-2003 946.31,-2003 859.69,-1959.69 903,-1959.69 946.31,-1959.69 859.69,-1444.49 903,-1444.49 946.31,-1444.49 859.69,-1401.18 946.31,-1401.18 859.69,-1357.87 903,-1357.87 946.31,-1357.87
"Green LED": P7.J2-13 R24.1 | length 180.1
  Bottom Layer w10: R24.1 1018.44,605.27 1018.44,546.18 1088.83,475.79 P7.J2-13@1088.83,470.96
NetC1_2: C1.2 R5.1 | length 81
  Bottom Layer w10: C1.2 534.64,-1192.07 R5.1
NetC2_1: C2.1 U2.12 | length 213
  Bottom Layer w10: C2.1 588.43,-1393.11 609.3,-1413.98 U2.12
NetC2_2: C2.2 U2.11 | length 285.2
  Bottom Layer w10: C2.2@517.57,-1401.18 525.64,-1401.18 564.02,-1439.57 U2.11
NetC4_1: C4.1 R6.2 | length 81.1
  Bottom Layer w10: C4.1@293,-1573 R6.2@293,-1491.9
NetC5_1: C5.1 U2.9 | length 72.9
  Bottom Layer w10: U2.9 786.86,-1561.43 C5.1
NetC6_2: C6.2 R14.1 | length 80.9
  Bottom Layer w10: C6.2 534.64,-1805.07 R14.1
NetC7_1: C7.1 U3.12 | length 212.5
  Bottom Layer w10: C7.1 588.43,-1996.11 608.12,-2015.8 U3.12
NetC7_2: C7.2 U3.11 | length 288.2
  Bottom Layer w10: C7.2@514.54,-2003 524.46,-2003 562.84,-2041.39 U3.11
NetC9_1: C9.1 R15.2 | length 78.7
  Bottom Layer w10: R15.2 C9.1
NetC10_1: C10.1 U3.9 | length 81.1
  Bottom Layer w10: U3.9 786.86,-2171.43 C10.1
NetDS1_2: DS1.2 R22.2 | length 171
  Top Layer w10: v1(734,668) 734,660.61 731,657.61 781.75,606.87 DS1.2
  Bottom Layer w10: v1(734,668) 734,655 738.65,650.35 755.29,650.35 779.78,625.86 R22.2
NetDS2_2: DS2.2 R23.2 | length 169.1
  Top Layer w10: v1(1064,675) 1071.65,667.35 1071.65,651.43 1103.04,620.05 DS2.2@1103.04,598.99
  Bottom Layer w10: v1(1064,675) 1064,671.64 1109.78,625.86 R23.2
NetDS3_2: DS3.2 R24.2 | length 157.6
  Top Layer w10: v1(895,666) 895,655.85 943.98,606.87 DS3.2
  Bottom Layer w10: v1(895,666) 899.64,666 939.78,625.86 R24.2
NetP1_1: 
NetP1_2: 
NetP2_1: 
NetP2_2: 
NetP3_1: P3.1 U2.7 | length 750.2
  Top Layer w10: P3.1@1443.77,-2027.9 v1(1443.77,-1909)
  Bottom Layer w10: U2.7 1038.92,-1465.16 1442.76,-1869 1442.76,-1908 v1(1443.77,-1909)
NetP3_2: P3.2 U2.10 | length 1357.7
  Top Layer w10: v1(623,-1503) 1087.26,-1503 1543.55,-1959.29 P3.2
  Bottom Layer w10: v1(623,-1503) 729.24,-1503 767.08,-1465.16 U2.10
NetP5_1: P5.1 U3.7 | length 1080.9
  Bottom Layer w10: P5.1 512.55,-2278 962.63,-2278 1056.7,-2183.93 1056.7,-2084.76 1038.92,-2066.98 U3.7
NetP5_2: P5.2 U3.10 | length 440.6
  Bottom Layer w10: P5.2 392.88,-2058.33 757.42,-2058.33 766.07,-2066.98 U3.10
NetR1_2: R1.2 R7.1 U2.2 | length 265.1
  Bottom Layer w10: U2.2 1144.34,-1337.2 1156.07,-1325.47 R1.2 1158.07,-1321 R7.1
NetR2_2: R2.2 U2.5 | length 137.4
  Bottom Layer w10: U2.5 1154.89,-1413.98 R2.2
NetR3_2: R3.2 U1.8-9 U2.1 | length 856.7
  Top Layer w10: 1100,-360 1760,-360 U1.8-9
  Bottom Layer w10: U2.1 1019.14,-1257.6 1097.6,-1257.6 v1(1103,-1263)
NetR4_2: R4.2 U2.16 | length 71.6
  Bottom Layer w10: R4.2 786.86,-1250.32 U2.16
NetR5_2: R5.2 U2.15 | length 217.1
  Bottom Layer w10: R5.2 601.56,-1281.86 656.91,-1337.2 U2.15
NetR8_1: R8.1 U1.8-12 U2.6 | length 1799.5
  Bottom Layer w10: U2.6 1111.5,-1439.57 1156.07,-1484.14 1156.07,-1501.86 1207.13,-1552.92 1516.25,-1552.92 1583.13,-1486.05 1583.13,-760.3 1783.43,-560 1840,-560 U1.8-12
NetR9_1: R9.1 U2.8 | length 63.4
  Bottom Layer w10: R9.1 1019.14,-1550.32 U2.8
NetR10_2: R10.2 U3.2 | length 186.4
  Bottom Layer w10: U3.2 1172.37,-1939.02 1189.54,-1921.86 R10.2
NetR11_2: R11.2 U3.5 | length 172.4
  Bottom Layer w10: U3.5 R11.2
NetR12_2: R12.2 U1.8-30 U3.1 | length 1128.6
  Signal Layer 2 w10: v1(1093,-1843) 1345,-1843 1743.51,-1444.49 1850,-1444.49 1894.49,-1400 U1.8-30
  Bottom Layer w10: R12.2@1016.46,-1843 1019.14,-1845.68 U3.1 ; R12.2 v1(1093,-1843)
NetR13_2: R13.2 U3.16 | length 71.5
  Bottom Layer w10: U3.16 786.86,-1845.68 R13.2@789.54,-1843
NetR14_2: R14.2 U3.15 | length 213.7
  Bottom Layer w10: R14.2 601.56,-1891.86 613.3,-1903.59 731.64,-1903.59 767.08,-1939.02 U3.15
NetR16_1: R16.1 U1.8-18 U3.6 | length 2367.6
  Bottom Layer w10: U3.6 1149.21,-2041.39 1191.54,-2083.71 R16.1 1191.54,-2141.54 1200,-2150 1928.16,-2150 1950,-2128.16 1950,-850 U1.8-18
NetR17_1: R17.1 U3.8 | length 71.5
  Bottom Layer w10: R17.1@1016.46,-2163 1019.14,-2160.32 U3.8
NetR18_1: R18.1 U4.3 | length 90.1
  Bottom Layer w10: R18.1 1166.46,-657.27 1178.2,-669 U4.3@1247.43,-669
NetR19_2: R19.2 U4.2 | length 100.4
  Bottom Layer w10: R19.2 1166.47,-714.14 1191.92,-688.69 U4.2@1247.43,-688.69
NetR21_1: R21.1 U5.3 | length 77.1
  Bottom Layer w10: R21.1 786.54,-789.61 U5.3
NetU1_8-10: U1.8-10 | length 420.7
  Signal Layer 1 w10: 1585.98,-657.45 1783.43,-460 1840,-460 U1.8-10
NetU1_8-11: U1.8-11 U2.3 | length 800.5
  Bottom Layer w10: 1016.14,-459.8 1759.8,-459.8 U1.8-11
NetU1_8-17: U1.8-17 U3.3 | length 1823.3
  Bottom Layer w10: U3.3 1541.39,-1964.61 1541.39,-1954.49 1650,-1845.88 1650,-900 1750,-800 U1.8-17
NetU1_8-27: U1.8-27
NetU1_8-35: U1.8-35
NetU1_8-36: U1.8-36
NetU1_8-37: U1.8-37
NetU1_8-38: U1.8-38
NetU1_9-9: U1.9-9
"Red LED": P7.J2-11 R22.1 | length 231.8
  Bottom Layer w10: R22.1 846.71,608.14 858.44,596.41 889.41,596.41 1010.03,475.79 P7.J2-11@1010.03,470.96
RS232_RX: R27.1 U1.9-11 | length 1720.1
  Top Layer w10: U1.9-11@-95.24,-502.39 -95.24,-495.24 -40,-440 -40,16.57 271.42,327.99 ; 359.42,30.99 631.38,30.99 954.54,354.14 R27.1
RS232_TX: R26.1 U1.9-13 | length 1413.8
  Top Layer w10: U1.9-13@-99.97,-603.96 U1.9-13 -49,-549 190,-549 942.8,203.8 942.8,221.27 R26.1
RXD: P7.J2-18 R27.2 | length 356.3
  Top Layer w10: R27.2@1021.46,353 1031.46,363 v1(1288,363)
  Bottom Layer w10: P7.J2-18 1285.94,448.3 1285.94,381.48 1293.92,373.5 v1@1298.5,373.5
SPI1_CS0: U1.9-28
SPI1_MISO: R20.1 U1.9-29 U5.1 | length 1271.2
  Top Layer w10: U1.9-29 -50,-1350 43,-1350 515,-878 v1(763,-878)
  Bottom Layer w10: v1(763,-878) 773.82,-878 787.41,-864.41 869.46,-864.41 875.28,-870.24 875.28,-925.28 R20.1
SPI1_MISO_DELAY: R20.2 U4.1 U5.6 | length 426.5
  Bottom Layer w10: R20.2 965.68,-925.28 965.68,-870.24 971.5,-864.41 1081.52,-864.41 1226.42,-719.51 1226.42,-709.21 1227.25,-708.37 U4.1@1247.43,-708.37
SPI1_MOSI: U1.9-30
SPI1_SCLK: U1.9-31 U4.4 | length 2309.9
  Bottom Layer w10: U1.9-31 -50,-1450 50,-1450 150,-1350 150,-900 550,-500 1265.07,-500 1352,-586.93 1313,-625.93 1313,-650.31 U4.4
  other v1: 953,-549
TXD: P7.J2-16 R25.2 R26.2 | length 383.1
  Top Layer w10: R26.2 R25.2
  Bottom Layer w10: v1(1078,233) 1205.09,360.09 P7.J2-16
VCC_2V85: P7.J3-20 R25.1 | length 299
  Top Layer w10: R25.1 v1(1391.18,233)
  Bottom Layer w10: P7.J3-20 1362.3,204.12 v1(1391.18,233)
pads on no net: P7.hole P7.J2-5 P7.J2-6 P7.J2-7 P7.J2-8 P7.J2-9 P7.J2-10 P7.J2-12 P7.J2-15 P7.J2-17 P7.J2-19 P7.J2-20 P7.J3-1 P7.J3-2 P7.J3-3 P7.J3-4 P7.J3-5 P7.J3-6 P7.J3-7 P7.J3-8 P7.J3-9 P7.J3-10 P7.J3-11 P7.J3-12 P7.J3-13 P7.J3-14 P7.J3-15 P7.J3-16 P7.J3-17 P7.J3-18 P7.J3-19 U1. U1.8-3 U1.8-4 U1.8-5 U1.8-6 U1.8-7 U1.8-8 U1.8-13 U1.8-14 U1.8-15 U1.8-16 U1.8-19 U1.8-20 U1.8-21 U1.8-22 U1.8-23 U1.8-24 U1.8-25 U1.8-26 U1.8-28 U1.8-29 U1.8-31 U1.8-32 U1.8-33 U1.8-34 U1.8-39 U1.8-40 U1.8-41 U1.8-42 U1.8-43 U1.8-44 U1.8-45 U1.8-46 U1.9-7 U1.9-8 U1.9-10 U1.9-12 U1.9-14 U1.9-16 U1.9-17 U1.9-18 U1.9-19 U1.9-20 U1.9-21 U1.9-22 U1.9-23 U1.9-24 U1.9-25 U1.9-26 U1.9-27 U1.9-32 U1.9-33 U1.9-34 U1.9-35 U1.9-36 U1.9-37 U1.9-38 U1.9-39 U1.9-40 U1.9-41 U1.9-42

## Polygon pours and split planes (outlines as drawn)
GND on Bottom Layer "GND" (solid, shelved, pour order 0): 1981,1065 1981,-2689 -174.24,-2689 -174.24,1065
GND on Top Layer "GND" (solid, shelved, pour order 2): 1981,1065 1981,-2689 -174.24,-2689 -174.24,1065

## Silkscreen, mask and mechanical layers (free items; w line width, h text height)
Top Overlay:
  circle w10: c885.19,-2024.39 r196.85
  circle w3.94: c885.19,-2024.39 r183.58
  lines w3.94: 828.19,-2834.39 858.19,-2864.39 888.19,-2844.39 848.19,-2894.39 908.19,-2864.39 868.19,-2914.39 928.19,-2884.39 888.19,-2934.39 948.19,-2904.39 908.19,-2954.39 968.19,-2924.39 948.19,-2954.39 978.19,-2984.39
  lines w10: 808.19,-2829.39 848.19,-2829.39 ; 828.19,-2834.39 828.19,-2984.39 978.19,-2984.39
  text "TOP" at 1432,663 h39.37
  text "Encoder" at 793,-1339 h39.37
  text "LM-004" at 604.87,-1460 h50
  text "REV A" at 604.87,-1540 h50
  text "ZLS Corp" at 600,-1616.03 h50
  text "Shaft" at 1393,-2229 h39.37
  text "Arrestment" at 143,-2239 h39.37
  text "ZLS" at 870.98,-3048.84 h29.53

## Dimensions
-174.24,-2689 to -174.24,1065 on Mechanical 13
-174.24,1065 to 1981,1151 on Mechanical 13

## Text inside footprints (layer, text, board x,y; h text height)
P7: Bottom Overlay "J3-1" at 255.48,88.99 h39.37; Bottom Overlay "J2-1" at 265.48,418.99 h39.37
U1: Top Overlay "P9" at -80,-2330 h39.37; Top Overlay "P8" at 1830,-2330 h39.37